# Altium PCB FlowSense-TX.PcbDoc
Units mil, origin at the board's own origin, x right, y up, seen from the top; angles counter-clockwise.
Board outline 1135.59 x 1005 mil, 2 copper layers (L1, L2), stack 62.8 mil thick; 34 components, 27 nets, 155 pads, 20 vias.
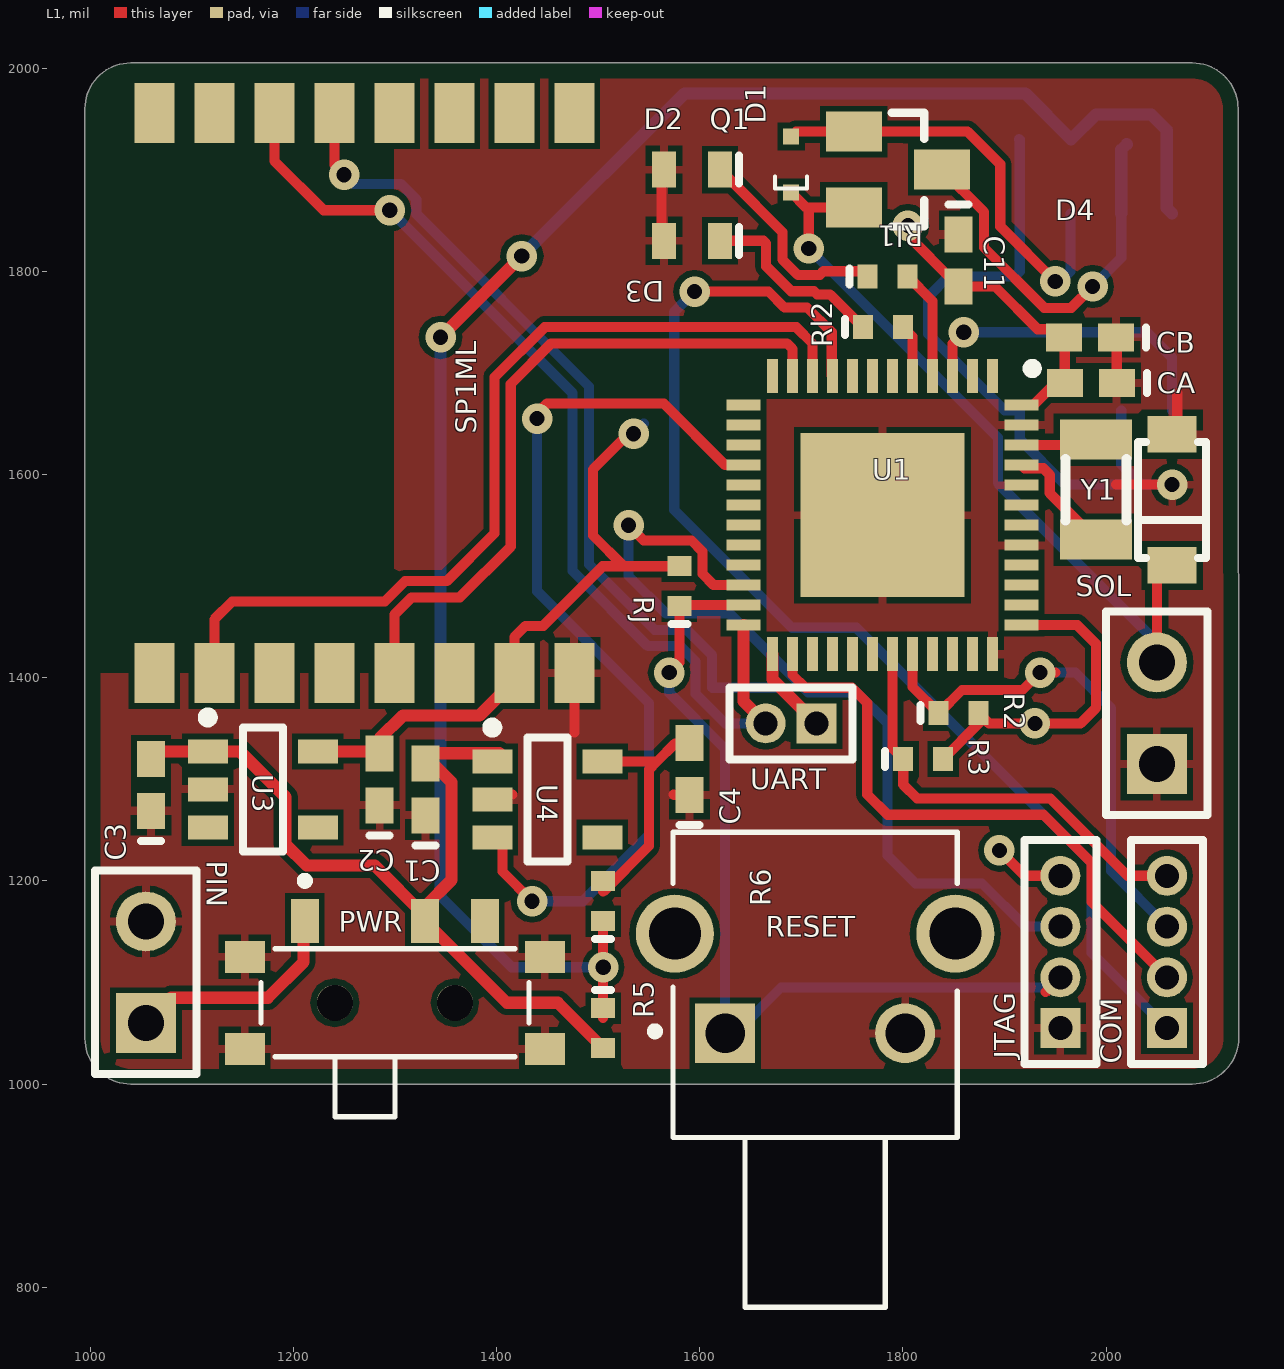
[diagram p0: L1 view]
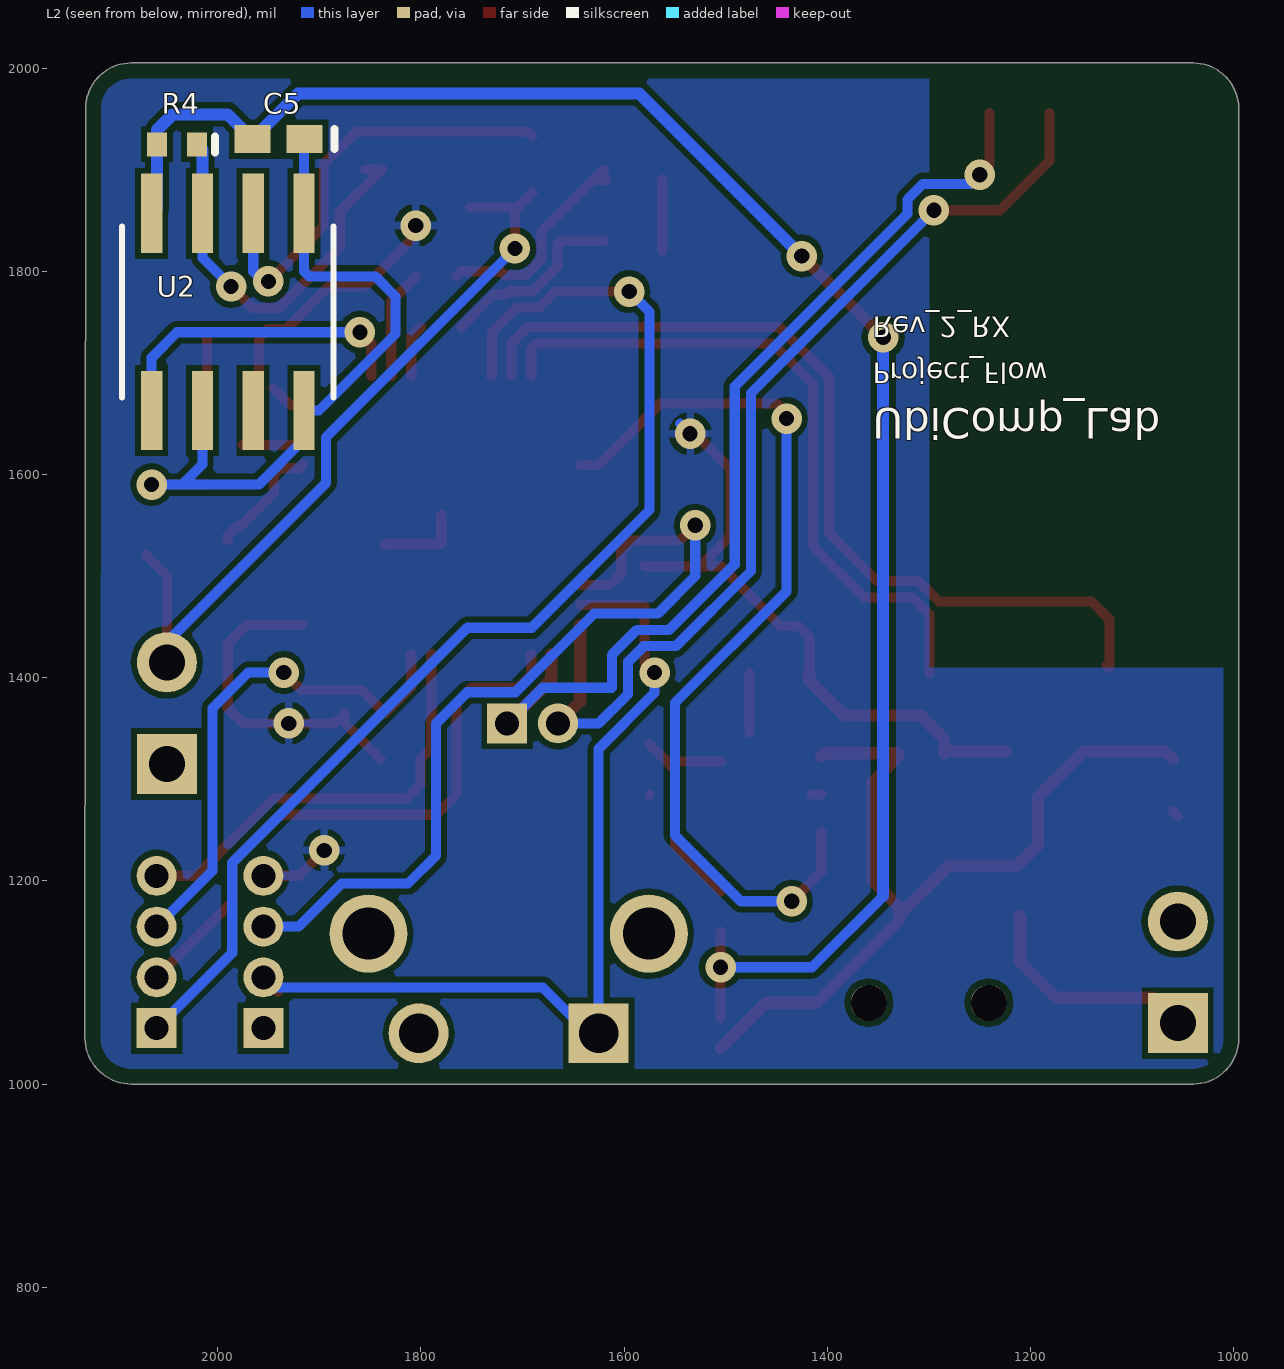
[diagram p1: L2 view, seen from below]

## Layer stack, top to bottom
Top Solder: solder mask 0.1, Solder Resist, Dk 0
L1: signal copper 1.4
Core: dielectric 60, FR-4, Dk 4.6
L2: signal copper 1.4
Bottom Solder: solder mask 0.1, Solder Resist, Dk 0

## Board outline
1040,1000 cw(c1040,1045) 995,1045 995,1960 cw(c1040,1960) 1040,2005 2085,2005 cw(c2085,1960) 2130,1960 2130.59,1045.59 cw(c2085,1045.59) 2085,1000

## Design rules (kind name [scope] priority, off if disabled: settings)
BoardOutlineClearance [All] p1: gap=15 ignorepadtopadclearanceinfootprint=FALSE
Clearance [All] p1: gap=6 ignorepadtopadclearanceinfootprint=FALSE except(0: Arc-Hole Track-Hole SMDPad-Hole THPad-Hole Via-Hole Fill-Hole Poly-Hole Region-Hole Text-Hole)
ComponentClearance [All] p1: gap=1 collisioncheckmode=3 verticalgap=1 showdistances=FALSE
DiffPairsRouting [All] p1: maxlimit=393.7 minlimit=6 mostfreqgap=8 toplayer_minwidth=6 toplayer_maxwidth=15 toplayer_prefwidth=8 bottomlayer_minwidth=6 bottomlayer_maxwidth=15 bottomlayer_prefwidth=8 maxuncoupledlength=500
HoleSize [All] p1: absolutevalues=TRUE maxlimit=265 minlimit=13 maxpercent=80.000 minpercent=20.000
HoleToHoleClearance [All] p1: gap=10 allowstackedmicrovias=FALSE
MinimumAnnularRing [All] p1: minimumring=7
MinimumSolderMaskSliver [All] p1: minsoldermaskwidth=0
PlaneClearance [All] p1: clearance=10
PlaneConnect [All] p1: planeconnectstyle=Direct reliefexpansion=16 reliefentries=4 reliefconductorwidth=6 reliefairgap=6
PolygonConnect [All] p1: connectstyle=Relief reliefconductorwidth=8 reliefentries=4 polygonreliefangle="90 Angle" airgapwidth=6
RoutingCorners [All] p1: cornerstyle=45-Degree minsetback=49.21 maxsetback=49.21
RoutingVias [All] p1: holewidth=15 width=30 viastyle="Through Hole" minholewidth=13 minwidth=27 maxholewidth=100 maxwidth=114
SilkToSilkClearance [All] p1: silktosilkclearance=0
SilkToSolderMaskClearance [IsPad] p1: minsilkscreentomaskgap=6 clearancetoexposedcopper=TRUE
SolderMaskExpansion [All] p1: expansion=2.95
Width [All] p1: maxlimit=400 minlimit=6 preferedwidth=8
20 further rules are at their usual default settings.

## Classes and differential pairs
component class peripheral: C1 C2 C3 C4 C5 D1 D4 PIN PWR Q1 R4 R5 R6 SOL SP1ML U2 U3 U4 UART
component class MSP430: C11 CA CB COM D2 D3 JTAG R2 R3 RESET Rj Rl1 Rl2 U1 Y1

## Components (designator, comment, footprint, x,y, rotation, side; value= is the part's Value field where it differs from the comment)
C1 "Cap" 0402-W 1330,1290 r90 top value=1u
C2 "Cap" 0402-W 1285,1300 r90 top value=100pF
C3 "Cap" 0402-W 1060,1294.41 r90 top value=1u
C4 "Cap" 0402-W 1590,1310 r90 top value=2.2u
C5 "Cap" 0402-W 1940,1930 r0 bottom value=100uF
C11 "Cap" 0402-W 1855,1810.59 r270 top value=4.7uF
CA "Cap" 0402-W 1985,1690 r180 top value=10u
CB "Cap" 0402-W 1984.41,1735 r180 top value=0.1u
COM "MHDR1X4" MHDR1X4 2060,1055 r90 top
D1 "Diode - Zener" SOD-523 1690,1905 r180 top
D2 "SML-311UTT86" 0603 1592.44,1900 r180 top
D3 "SML-311UTT86" 0603 1592.44,1830 r180 top
D4 "Diode" "DIODE - SOD123" 2065,1575 r270 top
JTAG "MHDR1X4" MHDR1X4 1955,1055 r90 top
PIN "Header 2" HDR1X2 1055,1060 r90 top
PWR "MLL1200S" SW_MLL1200S_MLL1200S(Primary) 1300,1080 r0 top locked
Q1 "SI2323CDS-T1-GE3" SOT23 1795,1900 r270 top
R2 "R_Pullup_1" 0402 1855,1365 r0 top value=100k
R3 "R_Pullup_2" 0402 1820,1320 r0 top value=100k
R4 "R_Pullup_1" 0402 2040,1925 r0 bottom value=47R
R5 "R_Pullup_1" 0402 1505,1055 r270 top value=DNP
R6 "R_Pullup_1" 0402 1505,1180 r90 top value=DNP
RESET "FSMRA6JH" TE_FSMRA6JH_FSMRA6JH(Primary) 1625,1050 r0 top
Rj "Res" 0402 1580,1490 r90 top value=47k
Rl1 "Res" 0402 1785,1795 r0 top value=470
Rl2 "Res" 0402 1780.31,1745 r0 top value=470
SOL "Header 2" HDR1X2 2050,1315 r90 top
SP1ML "SP1ML-868" STM_SP1ML-868 1270,1680 r90 top locked
U1 "MSP430 Wolverine 48-Pin" MSP_QFN48_RGZ_PAD0 1780,1560 r270 top locked
U2 "LTC1154HS8TRPBF" SOIC-8_S 1990,1760 r90 bottom
U3 "TPS709" SOT95P280X145-5N 1170,1290 r0 top
U4 "TPS709" SOT95P280X145-5N 1450,1280 r0 top
UART "MHDR1X2" MHDR1X2 1715,1355 r180 top
Y1 "XTAL" "XTAL [3.20mm x 1.50mm]" 1990,1585 r90 top value=32.768kHz

## Footprints (in the part's own frame and the unit in brackets; to place one, negate y for a bottom-side part, rotate by r counter-clockwise, add the part's x,y. Pads: shape width x height; smd on the part's side, far side on the other; paste and mask are expansions set on the pad)
0402 [mm] "Surface Mount; Body 1 x 0.5 mm (LxW typ)"
  rect 0.5x0.6 smd: 1(-0.5,0) 2(0.5,0)
  silkscreen extent -0.95,-0.2 -0.95,0.2, body extent -0.5,-0.25 0.5,0.25, height 0.5
0402-W [mm] "Surface Mount - Wide; Body 1.0 x 0.5 mm (LxW typ)"
  rect 0.9x0.7 smd: 1(-0.65,0) 2(0.65,0)
  silkscreen extent -1.4,-0.25 -1.4,0.25, body extent -0.5,-0.25 0.5,0.25, height 0.5
0603 [mm] "Surface Mount; Body 1.6 x 0.8 mm (LxW typ)"
  rect 0.6x0.9 smd: 1(-0.7,0) 2(0.7,0)
  silkscreen extent -1.17,-0.35 -1.17,0.35, body extent -0.8,-0.4 0.8,0.4, height 0.8
"DIODE - SOD123" [mil] "SOD-123; 2 Leads; Body 2.7 x 1.6 mm, (LxW)"
  rect 36x48 smd: 1(-64.5,0) 2(64.5,0)
  silkscreen extent -57,-33 57,33, body extent -57,-33 57,33, height 91
HDR1X2 [mm] "Connector; Header; 2 Position"
  rect 1.5x1.5 hole 0.9: 1(0,0)
  round 1.5 hole 0.9: 2(2.54,0)
  silkscreen extent -1.27,-1.27 3.81,1.27
MHDR1X2 [mm] "Connector; Header; 2 Position"
  rect 1x1 hole 0.6: 1(0,0)
  round 1 hole 0.6: 2(1.27,0)
  silkscreen extent -0.9,-0.9 2.17,0.9
MHDR1X4 [mm] "Connector; Header; 4 Position"
  rect 1x1 hole 0.6: 1(0,0)
  round 1 hole 0.6: 2(1.27,0) 3(2.54,0) 4(3.81,0)
  silkscreen extent -0.9,-0.9 4.71,0.9
MSP_QFN48_RGZ_PAD0 [mm]
  rect 4.1x4.1 smd: 0(0,0)
  rect 0.85x0.28 smd: 1(-3.475,2.75) 2(-3.475,2.25) 3(-3.475,1.75) 4(-3.475,1.25) 5(-3.475,0.75) 6(-3.475,0.25) 7(-3.475,-0.25) 8(-3.475,-0.75) 9(-3.475,-1.25) 10(-3.475,-1.75) 11(-3.475,-2.25) 12(-3.475,-2.75) 25(3.475,-2.75) 26(3.475,-2.25) 27(3.475,-1.75) 28(3.475,-1.25) 29(3.475,-0.75) 30(3.475,-0.25) 31(3.475,0.25) 32(3.475,0.75) 33(3.475,1.25) 34(3.475,1.75) 35(3.475,2.25) 36(3.475,2.75)
  rect 0.28x0.85 smd: 13(-2.75,-3.475) 14(-2.25,-3.475) 15(-1.75,-3.475) 16(-1.25,-3.475) 17(-0.75,-3.475) 18(-0.25,-3.475) 19(0.25,-3.475) 20(0.75,-3.475) 21(1.25,-3.475) 22(1.75,-3.475) 23(2.25,-3.475) 24(2.75,-3.475) 37(2.75,3.475) 38(2.25,3.475) 39(1.75,3.475) 40(1.25,3.475) 41(0.75,3.475) 42(0.25,3.475) 43(-0.25,3.475) 44(-0.75,3.475) 45(-1.25,3.475) 46(-1.75,3.475) 47(-2.25,3.475) 48(-2.75,3.475)
  silkscreen extent -3.78,3.63 -3.55,3.85, body extent -3.3,-3.3 3.3,3.3, height 1
SOD-523 [mm] "SOD-523 Footprint"
  rect 0.4x0.4 smd: 1(0,0.7) 2(0,-0.7)
  silkscreen extent -0.4,0.3 0.4,0.6, body extent -0.4,-0.6 0.4,0.6, height 1
SOIC-8_S [mil]
  rect 78x21 smd: 1(-97,75) 2(-97,25) 3(-97,-25) 4(-97,-75) 5(97,-75) 6(97,-25) 7(97,25) 8(97,75)
  silkscreen extent -84,-104 84,104
SOT23 [mm]
  rect 1x1.4 smd: 1(-0.95,-1.1) 2(0.95,-1.1) 3(0,1.1)
  silkscreen extent -1.42,-0.15 1.42,0.66
SOT95P280X145-5N [mm] "SOT23, 5-Leads, Body 2.90x2.80mm, Pitch 0.95mm, IPC Medium Density"
  rect 1x0.6 smd: 1(-1.375,0.95) 2(-1.375,0) 3(-1.375,-0.95) 4(1.375,-0.95) 5(1.375,0.95)
  silkscreen extent -1.5,-1.55 0.5,1.92, body extent -0.88,-1.52 0.87,1.53, height 1.45
STM_SP1ML-868 [mm]
  rect 1.5x1 smd: 1(-7,5.25) 2(-7,3.75) 3(-7,2.25) 4(-7,0.75) 5(-7,-0.75) 6(-7,-2.25) 7(-7,-3.75) 8(-7,-5.25) 9(7,-5.25) 10(7,-3.75) 11(7,-2.25) 12(7,-0.75) 13(7,0.75) 14(7,2.25) 15(7,3.75) 16(7,5.25)
SW_MLL1200S_MLL1200S(Primary) [mm]
  rect 0.7x1.1 smd: 1(-2.25,2.05) 2(0.75,2.05) 3(2.25,2.05)
  rect 1x0.8 smd: G1(-3.75,1.15) G2(3.75,1.15) G3(-3.75,-1.15) G4(3.75,-1.15)
  round 0.9 hole 0.9 unplated: None(-1.5,0) None(1.5,0)
  silkscreen extent -3.35,-2.85 3.35,3.15
TE_FSMRA6JH_FSMRA6JH(Primary) [mm]
  rect 1.498x1.498 hole 0.99: 1(0,0)
  round 1.498 hole 0.99: 2(4.5,0)
  round 1.95 hole 1.3: S1(-1.255,2.49) S2(5.755,2.49)
  silkscreen extent -1.85,-6.85 5.81,5.02
"XTAL [3.20mm x 1.50mm]" [mm] "FC-135   crystal - epson eletronics"
  rect 1x1.8 smd: 1(-1.25,0) 2(1.25,0)
  silkscreen extent -0.76,-0.76 0.76,0.76

## Part data
C1 C2 C3 C4 C5 C11 CA CB: "Ceramic Capacitor (Surface Mount)", Manufacturer="Generic Ceramic Chip Cap (TBD)"
COM JTAG: "Header, 4-Pin", LatestRevisionDate=17-Jul-2002, LatestRevisionNote="Re-released for DXP Platform.", Publisher="Altium Limited"
D2 D3: "LED 630NM RED WTR CLR 0603 SMD"
D4: "General Purpose Diode"
PIN SOL UART: "Header, 2-Pin", LatestRevisionDate=17-Jul-2002, LatestRevisionNote="Re-released for DXP Platform.", Publisher="Altium Limited"
PWR: "SWITCH SLIDE SPDT 300MA 4V", Package=None, Availability=Good, MF=TE, MP=MLL1200S, Price="1.57 USD"
Q1: "MOSFET P-CH 20V 6A SOT-23", Package="SOT-23-3 Vishay", Availability=Good, MF=Vishay, MP=SI2323CDS-T1-GE3, Price="0.41 USD"
R2 R3 R4 R5 R6: library part Res, "Chip Resistor (Surface Mount)", Manufacturer="Generic Chip Res (TBD)", Comment_1=Res
RESET: "Switch, Tactile, Spno, r/a", Package=None, Availability=Good, MF="TE Connectivity", MP=FSMRA6JH, Price="0.10 USD"
Rj Rl1 Rl2: "Chip Resistor (Surface Mount)", Manufacturer="Generic Chip Res (TBD)"
SP1ML: "RF TXRX MODULE ISM<1GHZ CHIP ANT", Package="SMD-16 STMicroelectronics", Availability=Good, MF=STMicroelectronics, MP=SP1ML-868, Price="16.88 USD"
U1: library part MSP430FR596X_586X_RGZ, "16-bit FRAM MCU"
U2: "IC MOSFET DRIVER HIGH-SIDE 8SOIC", Package="SOIC-8 Linear Technology", Availability=Unavailable, MF="Linear Technology", MP=LTC1154HS8#TRPBF, Price="2.92 USD"
U3 U4: "Ultra low power Voltage Regulator"
Y1: library part "XTAL 2-pins", "Crystal Oscillator - [3.20mm x 1.50mm]", Digi-Key Part Number="example: SE2413CT-ND", Manufacturer="Epson Toyocom Corporation", Manufacturer Part Number="FC-135 32.7680KA-A3"

## Via types
v1: diameter 30, hole 15, L1 to L2, 20 vias

## Nets (pads, with @x,y where several pads share a name; then routed paths per layer and width w, separated by ;. In a path a pad name is that pad's centre, name@x,y a point inside that pad or via, vN(x,y) a via of type N, cw(c..) or ccw(c..) an arc to the next point about the centre after c; other vN are vias at no path point)
BATTERY_OUT: PIN.1 PWR.1 | length 226.1
  L1 w12: PIN.1 1080,1085 1175,1085 1210,1120 1210,1164.29 PWR.1@1211.42,1165.71
GND: C1.1 C2.1 C3.1 C4.1 C5.1 C11.1 CA.1 CB.1 D2.2 D3.2 D4.1 JTAG.1 PIN.2 PWR.G1 PWR.G2 PWR.G3 PWR.G4 RESET.2 SOL.1 SP1ML.8 U1.0 U1.36 U1.41 U1.44 U1.47 U2.2 U2.4 U2.5 U3.2 U4.2 | length 1033.2
  L1 w10: C3.1@1055,1263.82 C3.1 ; U4.2@1405.87,1285 U4.2@1415.52,1285 ; 1476.69,1346.18 SP1ML.8 ; D3.2@1562.44,1820 D2.2@1562.44,1890 ; 1574.41,1285 1575,1284.41 ; U1.0 1780,1531.46 1835,1531.46 U1.0@1835.99,1530.47 ; 2010,1590 v1(2065,1590) ; CB.1 CB.1@2010.59,1734.41 ; CA.1 CB.1@2010.59,1734.41 ; CB.1@2010.59,1739.41 CB.1@2010.59,1734.41 ; D4.1@2070,1649.5 2070,1680
  L2 w10: C5.1 1915,1929.41 U2.5 1915,1800 1910,1795 1845,1795 1825,1775 1825,1738.23 1900.23,1663 U2.4 1915,1634.5 1959.5,1590 2035,1590 ; U2.2 2015,1610 2035,1590 ; v1(2065,1590) 2035,1590
LED1: Rl1.2 U1.4 | length 108.3
  L1 w10: Rl1.2 1829.21,1770.47 U1.4
LED2: Rl2.2 U1.5 | length 52.1
  L1 w10: Rl2.2 1809.53,1735.47 U1.5
NetC1_2: C1.2 C3.2 PWR.2 R5.2 U3.1 U4.1 | length 858
  L1 w12: C3.2 1067.4,1327.4 U3.1 1147.6,1327.4 1192.45,1282.55 1192.45,1235.82 1213.27,1215 1280.24,1215 PWR.2@1329.53,1165.71 ; U4.1@1405.87,1322.4 1402.68,1325.59 1330,1325.59 1330,1322.88 1355.78,1297.1 1355.78,1200.78 1329.53,1174.53 PWR.2@1329.53,1165.71 ; R5.2 1460.31,1080 1410.24,1080 PWR.2 PWR.2@1329.53,1165.71
NetC5_2: C5.2 R4.2 R5.1 R6.1 U2.8 | length 1757.5
  L1 w10: R5.1@1505,1065 R5.1 v1(1505,1115) 1505,1150
  L1 w12: v1(1345,1735) v1(1425,1815)
  L2 w10: 1345,1185 1415,1115 v1(1505,1115)
  L2 w12: 1345,1185 v1(1345,1735) ; v1(1425,1815) 1585,1975 1920.59,1975 C5.2 1990,1954.41 2044.41,1954.41 2059.69,1939.13 R4.2 2059.69,1862.31 U2.8
NetCOM_1: COM.1 U1.9 | length 1166.4
  L1 w10: v1(1595,1780) 1667.78,1780 1683.38,1764.4 1705.6,1764.4 1730,1740 1730,1697.6 U1.9
  L2 w10: v1(1595,1780) 1575,1760 1575,1565 1690.8,1449.2 1754.2,1449.2 1985.69,1217.71 1985.69,1129.31 COM.1
NetCOM_2: COM.2 U1.26 | length 587.6
  L1 w10: U1.26 1691.42,1402.62 1704.04,1390 1750,1390 1765,1375 1765,1285 1785,1265 1938.4,1265 1985.69,1217.71 1985.69,1179.31 COM.2
NetCOM_3: COM.3 R2.1 U1.32 | length 522.4
  L1 w10: U1.32 1809.53,1390.79 R2.1 1858.13,1387.81 1917.81,1387.81 v1(1935,1405) 1950,1405
  L2 w10: v1(1935,1405) 1970,1405 2005,1370 2005,1210 COM.3
NetCOM_4: COM.4 R3.1 U1.31 | length 429.7
  L1 w10: U1.31 1789.84,1330.47 R3.1 1800.32,1294.68 1814,1281 1945.02,1281 2021.02,1205 COM.4
NetD1_1: D1.1 D4.2 Q1.2 SOL.2 | length 771.1
  L1 w10: D1.1 1704.84,1862.6 1707.4,1862.6 ; v1(1707.4,1822.4) 1707.4,1862.6 ; Q1.2 1707.4,1862.6 ; SOL.2 2050,1500.5 D4.2@2070,1520.5
  L2 w10: v1(1707.4,1822.4) 1893.5,1636.3 1893.5,1591.5 2050,1435 SOL.2
NetD1_2: D1.2 Q1.1 U2.6 | length 435
  L1 w10: D1.2 1694.84,1937.4 Q1.1 1863.71,1937.4 1895.78,1905.33 1895.78,1844.22 v1(1950,1790)
  L2 w10: v1(1950,1790) 1955,1790 1965,1800 U2.6
NetD2_1: D2.1 Rl1.1 | length 220
  L1 w10: D2.1@1617.56,1890 D2.1@1630,1890 ; D2.1 D2.1@1630,1890 ; Rl1.1 1760.32,1800 1721.77,1800 1718.17,1796.4 1696.63,1796.4 1681.4,1811.63 1681.4,1838.6 D2.1@1630,1890
NetD3_1: D3.1 Rl2.1 | length 188.9
  L1 w10: D3.1 1662.63,1830 1665.4,1827.23 1665.4,1805 1690,1780.4 1712.23,1780.4 1715.44,1777.19 1728.44,1777.19 Rl2.1
NetQ1_3: Q1.3 R4.1 U2.7 | length 404.6
  L1 w10: Q1.3@1855,1900 Q1.3 1838.31,1899.93 1879.78,1858.45 1879.78,1823.45 1939.23,1764 1965.77,1764 v1(1986.77,1785)
  L2 w10: v1(1986.77,1785) 2015,1813.23 U2.7
  L2 w12: U2.7 2015,1919.68 R4.1
NetSP1ML_2: SP1ML.2 U1.10 | length 888.3
  L1 w10: SP1ML.2@1125,1412.05 1122.36,1409.41 1122.36,1457.36 1140,1475 1290,1475 1310,1495 1351,1495 1398,1542 1398,1695.63 1447.37,1745 1695,1745 1711.1,1728.9 U1.10
NetSP1ML_5: SP1ML.5 U1.11 | length 682.8
  L1 w10: SP1ML.5 1299.53,1461.9 1316.63,1479 1364,1479 1414,1529 1414,1689 1454,1729 1686,1729 1691.42,1723.58 U1.11
NetSP1ML_13: SP1ML.13 U1.25 UART.1 | length 968.7
  L1 w10: SP1ML.13 1240.47,1904.53 v1(1250,1895)
  L1 w12: U1.25 1671.73,1398.27 UART.1
  L2 w10: v1(1250,1895) 1259,1886 1305.77,1886 1321,1870.77 1321,1856.63 1491,1686.63 1491,1511.63 1555.63,1447 1587.4,1447 1612,1422.4 1612,1390.63 1612.63,1390 1680,1390 UART.1
NetSP1ML_14: SP1ML.14 U1.24 UART.2 | length 986.8
  L1 w10: SP1ML.14 1181.42,1908.58 1230,1860 v1(1295,1860)
  L1 w12: U1.24 1643.19,1376.81 UART.2
  L2 w10: v1(1295,1860) 1475,1680 1475,1505 1549,1431 1580.77,1431 1596,1415.77 1596,1384 1625,1355 UART.2
NetU1_3: U1.3 U2.1 | length 315.1
  L1 w10: U1.3 1848.9,1728.9 v1(1860,1740)
  L2 w10: v1(1860,1740) 2040,1740 2065,1715 U2.1
NetU1_16: U1.16 U4.3 | length 922.2
  L1 w10: U4.3@1405.87,1247.6 1405.87,1209.13 v1(1435,1180) ; v1(1440,1655) 1435,1655 1450,1670 1565,1670 1565,1669.29 1625.08,1609.21 U1.16
  L2 w10: v1(1435,1180) 1485,1180 1550,1245 1550,1375 1440,1485 v1(1440,1655)
NetU1_45: U1.45 Y1.1 | length 116.6
  L1 w10: U1.45 1919.98,1606.04 1938.1,1606.04 1944.54,1599.6 1944.54,1581.63 1977.17,1549 1981,1549 1990,1540 Y1.1
NetU1_46: U1.46 Y1.2 | length 58.5
  L1 w10: U1.46 Y1.2@1975.32,1628.9
RST: JTAG.2 RESET.1 Rj.1 U1.23 | length 894.2
  L1 w10: v1(1570,1405) 1580,1415 Rj.1 1581.1,1471.42 U1.23 ; RESET.1@1615,1050 RESET.1 ; 1940.49,1090.49 JTAG.2
  L2 w10: v1(1570,1405) 1570,1385 1625,1330 RESET.1 1635,1050 1680,1095 1945,1095 JTAG.2
TEST: JTAG.3 U1.22 | length 844.5
  L1 w10: v1(1530,1550) 1545,1535 1591.9,1535 1602.81,1524.08 1602.81,1502.19 1613.9,1491.1 U1.22
  L2 w10: v1(1530,1550) 1530,1500 1567,1463 1629.63,1463 1706.94,1385.69 1754.31,1385.69 1785,1355 1785,1225 1812.58,1197.42 1877.89,1197.42 1920.31,1155 JTAG.3
VCC_3.3: C2.2 C11.2 CA.2 CB.2 JTAG.4 R2.2 R3.2 Rj.2 SP1ML.7 U1.37 U1.48 U3.5 | length 1332.1
  L1 w10: SP1ML.7 1417.64,1440 1428.64,1451.01 1446.01,1451.01 1504.69,1509.69 1525.31,1509.69 ; v1(1535,1640) 1530,1640 1495,1605 1495,1540 1525.31,1509.69 ; Rj.2 1525.31,1509.69 ; v1(1805,1845) 1800.25,1840.25 1800.25,1839.75 C11.2 1890.6,1785 1932.6,1743 1950.82,1743 CB.2 1959.41,1734.41 CA.2 ; R3.2 1874.69,1355 R2.2 1884.69,1355 v1(1930,1355) 1975,1355 1990,1370 1990,1433.46 1971.73,1451.73 U1.37 ; v1(1895,1230) 1920,1205 JTAG.4 ; U1.48 1928.27,1668.27 CA.2@1945,1685
  L1 w12: U3.5 1283.19,1327.4 C2.2 1285,1340 1307.88,1362.88 1383.24,1362.88 1417.64,1397.28 SP1ML.7
  L2 w10: v1(1535,1640) v1@1545,1650
VCC_5: C4.2 R6.2 U4.5 | length 228.7
  L1 w10: U4.5 1557.99,1317.4 ; 1505,1189.37 1550,1234.37 1550,1309.41 1557.99,1317.4 ; 1575.59,1335 1557.99,1317.4
pads on no net: PWR.3 PWR.None RESET.S1 RESET.S2 SP1ML.1 SP1ML.3 SP1ML.4 SP1ML.6 SP1ML.9 SP1ML.10 SP1ML.11 SP1ML.12 SP1ML.15 SP1ML.16 U1.1 U1.2 U1.6 U1.7 U1.8 U1.12 U1.13 U1.14 U1.15 U1.17 U1.18 U1.19 U1.20 U1.21 U1.27 U1.28 U1.29 U1.30 U1.33 U1.34 U1.35 U1.38 U1.39 U1.40 U1.42 U1.43 U2.3 U3.3 U3.4 U4.4

## Polygon pours and split planes (outlines as drawn)
GND on L1 "L1-GND" (solid, remove dead copper, pour order 36): 1299.53,2060 1299.53,1404.41 990.59,1404.41 990,1405 955,1370 955,960 2230,950 2175,2035
VCC_3.3 on L2 "L2-VCC_3.3" (solid, pour order 38): 1300,2005 1299.53,2004.53 1299.53,1410 995,1410 955,1370 955,985 2200,985 2215,1000 2215,2035

## Silkscreen, mask and mechanical layers (free items; w line width, h text height)
Bottom Overlay:
  text "Rev_2_RX" at 1355,1755 h20 r180
  text "Project_Flow" at 1355,1710 h20 r180
  text "UbiComp_Lab" at 1355,1665 h30 r180
Mechanical 1:
  the board outline again, w10